# Altium PCB STM_BLUEPILL.PcbDoc
Units mm, origin at the board's own origin, x right, y up, seen from the top; angles counter-clockwise.
Board outline 54 x 23 mm, 2 copper layers (Top Layer, Bottom Layer); 30 components, 49 nets, 163 pads, 175 vias.
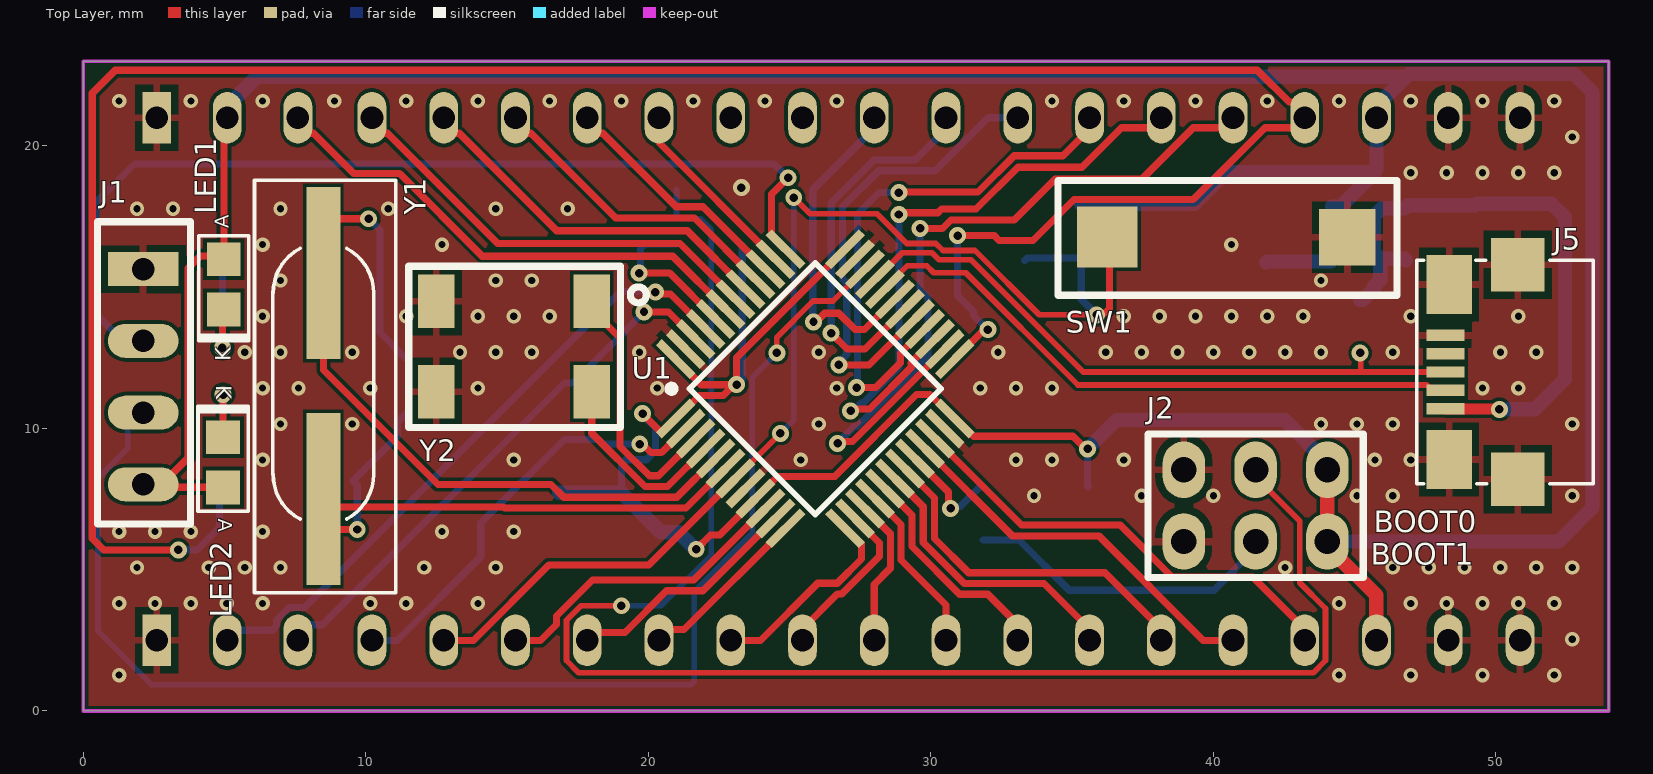
[diagram p0: Top Layer view]
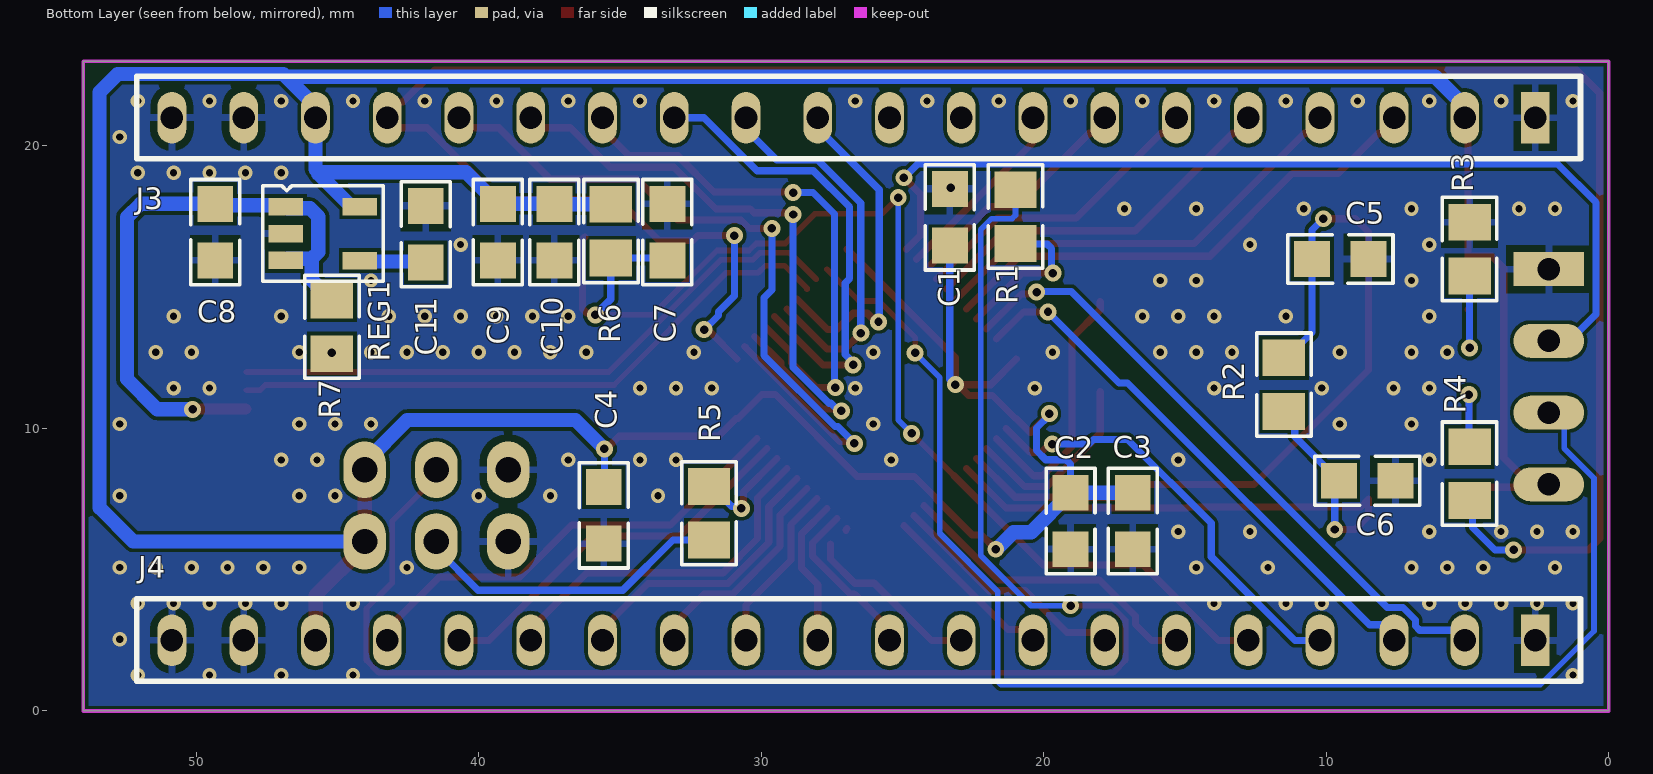
[diagram p1: Bottom Layer view, seen from below]
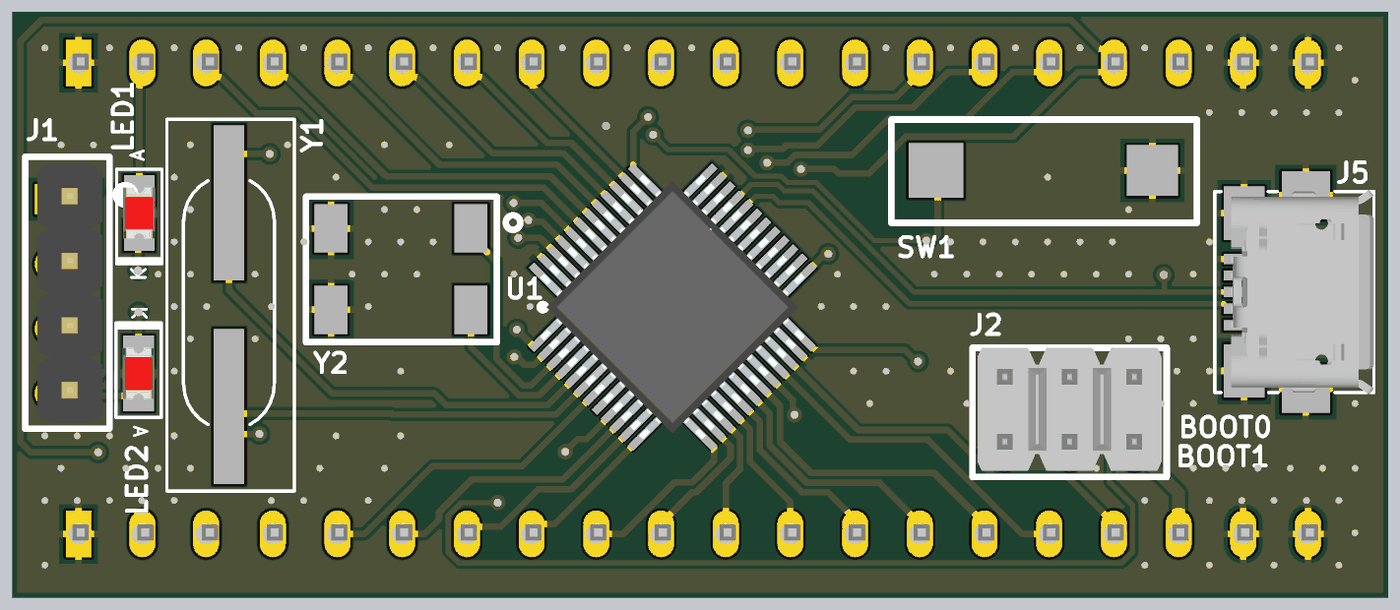
[diagram p2: 3D render of the assembled board from above, using the file's embedded part models]
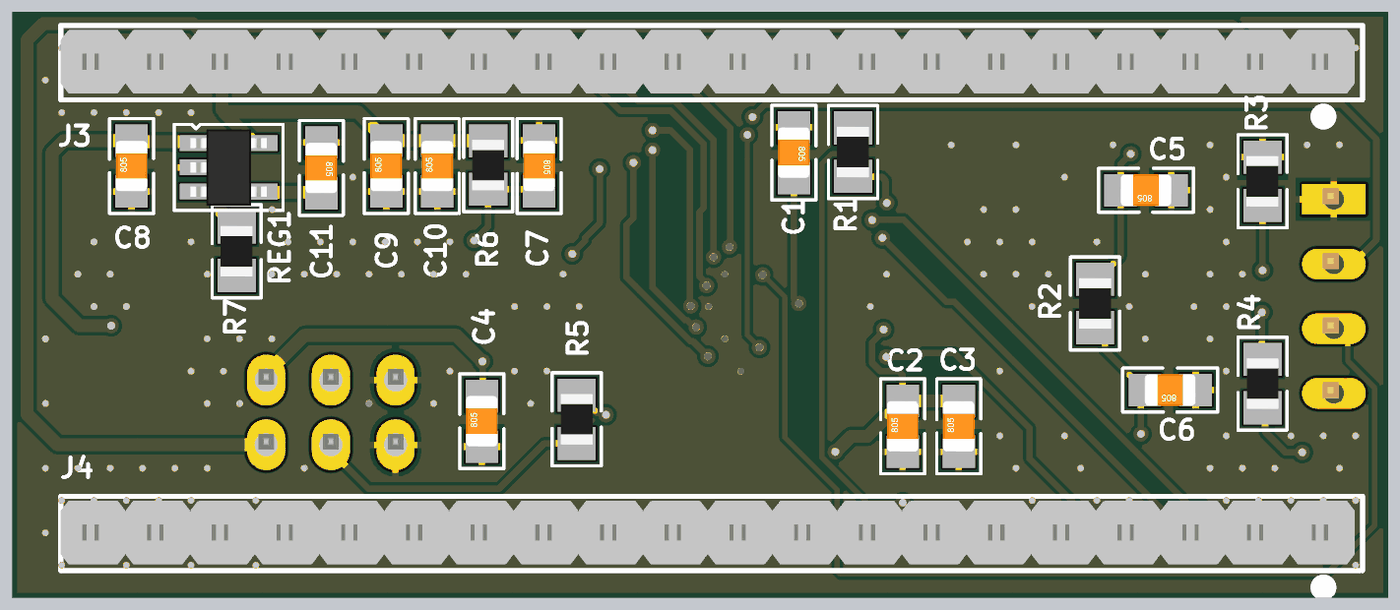
[diagram p3: 3D render of the assembled board from below, using the file's embedded part models]

## Layer stack, top to bottom
Top Solder: solder mask 0.0102, Solder Resist, Dk 3.5
Top Layer: signal copper 0.0356
Dielectric 1: dielectric 0.32, FR-4, Dk 4.8
Bottom Layer: signal copper 0.0356
Bottom Solder: solder mask 0.0102, Solder Resist, Dk 3.5

## Board outline
0,0 54,0 54,23 0,23

## Design rules (kind name [scope] priority, off if disabled: settings)
Clearance [All] p1: gap=0.127 ignorepadtopadclearanceinfootprint=TRUE
DiffPairsRouting DiffPair_90DiffPairsRouting [InDifferentialPairClass('diff_90')] p1: maxlimit=0.254 minlimit=0.254 mostfreqgap=0.254 toplayer_minwidth=0.203 toplayer_maxwidth=0.203 toplayer_prefwidth=0.203 bottomlayer_minwidth=0.203 bottomlayer_maxwidth=0.203 bottomlayer_prefwidth=0.203 maxuncoupledlength=12.7
DiffPairsRouting [All] p2: maxlimit=0.254 minlimit=0.254 mostfreqgap=0.254 toplayer_minwidth=0.381 toplayer_maxwidth=0.381 toplayer_prefwidth=0.381 bottomlayer_minwidth=0.381 bottomlayer_maxwidth=0.381 bottomlayer_prefwidth=0.381 maxuncoupledlength=12.7
MatchedLengths DiffPair_90MatchedLengths [InDifferentialPairClass('diff_90')] p1: tolerance=25.4 checknetsindiffpair=FALSE checkdiffpairvsdiffpair=TRUE checkxsignals=TRUE checkothers=TRUE
PolygonConnect [All] p1: connectstyle=Relief reliefconductorwidth=0.254 reliefentries=4 polygonreliefangle="90 Angle" airgapwidth=0.254
RoutingVias [All] p1: holewidth=0.711 width=1.27 viastyle="Through Hole" minholewidth=0.711 minwidth=1.27 maxholewidth=0.711 maxwidth=1.27
SolderMaskExpansion [All] p1: expansion=0.102 istentingtop=FALSE
Width [All] p1: maxlimit=1.27 minlimit=0.203 preferedwidth=0.254
29 further rules are at their usual default settings.

## Classes and differential pairs
differential pair class diff_90: D
component class [2]-Connector_Page: C8 C9 C10 C11 J3 J4 J5 R7 REG1
component class [1]-Controller_Page: C1 C2 C3 C4 C5 C6 C7 J1 J2 LED1 LED2 R1 R2 R3 R4 R5 R6 SW1 U1 Y1 Y2
differential pair D: +D_P -D_N

## Components (designator, comment, footprint, x,y, rotation, side; value= is the part's Value field where it differs from the comment)
C1 "0.1uF" CAP_0805 23.325,17.475 r270 bottom
C2 "0.1uF" CAP_0805 19.05,6.725 r90 bottom
C3 "0.1uF" CAP_0805 16.85,6.725 r90 bottom
C4 "0.1uF" CAP_0805 35.575,6.925 r90 bottom
C5 "22pF" CAP_0805 9.5,16 r0 bottom
C6 "22pF" CAP_0805 8.55,8.15 r0 bottom
C7 "0.1uF" CAP_0805 33.325,16.95 r270 bottom
C8 "0.1uF" CAP_0805 49.325,16.95 r90 bottom
C9 "0.1uF" CAP_0805 39.325,16.95 r90 bottom
C10 "1uF" CAP_0805 37.325,16.95 r90 bottom
C11 "22pF" CAP_0805 41.875,16.875 r270 bottom
J1 "4X1 Bergstrip" CON4_100_40D72_TH_ST_MALE 2.125,15.64 r0 top
J2 "2X3 Berg Strip" CON6_100_59D78_TH_ST_Duplicate 44.04,8.54 r180 top
J3 "20X1 Bergstrip" CON20_100_40D72_TH_ST 2.6,21 r270 bottom locked
J4 "20X1 Bergstrip" CON20_100_40D72_TH_ST 2.6,2.5 r270 bottom locked
J5 "MICRO USB2.0" CON_10118192-0001LF_SMD 49.5,12 r90 top
LED1 "RED LED" LED_0805 4.975,15.1 r90 top
LED2 "RED LED" LED_0805 4.95,8.8 r270 top
R1 "10K" RES_0805 21,17.5 r270 bottom
R2 "10Mohm" RES_0805 11.5,11.55 r90 bottom
R3 "1K" RES_0805 4.925,16.35 r270 bottom
R4 "1K" RES_0805 4.925,8.4 r90 bottom
R5 "10K" RES_0805 31.85,7 r90 bottom
R6 "10K" RES_0805 35.325,16.985 r270 bottom
R7 "10K" RES_0805 45.2,13.6 r270 bottom
REG1 "RT9193-33GB" SOT23-5 45.515,16.897 r270 bottom
SW1 "TACT SWITCH" SW_342_SMD 44.75,16.775 r0 top
U1 "STM32F103C8T6" LQFP-48_19.6_393_58X11_SMD 25.912,11.406 r45 top
Y1 "8MHz" XTAL_314_240X47_SMD 8.5,15.5 r270 top
Y2 "32.768KHz" "XTAL_MC-405 32.7680K-G3" 18,11.3 r180 top

## Footprints (in the part's own frame and the unit in brackets; to place one, negate y for a bottom-side part, rotate by r counter-clockwise, add the part's x,y. Pads: shape width x height; smd on the part's side, far side on the other; paste and mask are expansions set on the pad)
CAP_0805 [mm] "Ceramic Capacitor"
  rect 1.27x1.27 smd mask+0.076: 1(-1,0) 2(1,0)
  silkscreen extent -1.86,-0.86 1.86,0.86, body extent -1,-0.62 1,0.63, height 0.78
CON4_100_40D72_TH_ST_MALE [mm] "Berg Strip"
  rect 2.5x1.2 hole 0.8: 1(0,0)
  oval 2.5x1.2 hole 0.8: 2(0,-2.54) 3(0,-5.08) 4(0,-7.62)
  round 1.016 on Top Overlay: ""(2.311,0.178)
  silkscreen extent -1.63,-9.02 1.68,1.68, body extent -1.14,-8.76 1.4,1.4, height 8.55
CON6_100_59D78_TH_ST_Duplicate [mm] "Berg strip"
  oval 1.5x2 hole 0.9: 1(0,0) 2(0,2.54) 3(2.54,0) 4(2.54,2.54) 5(5.08,0) 6(5.08,2.54)
  silkscreen extent -1.27,-1.27 6.35,3.81, body extent -1.07,-1.27 6.15,3.56, height 8.18
CON20_100_40D72_TH_ST [mil] "Berg strip"
  rect 72x40 hole 31.5: 1(0,0)
  oval 72x40 hole 31.5: 2(0,-98.42) 3(0,-196.85) 4(0,-300) 5(0,-400) 6(0,-500) 7(0,-600) 8(0,-700) 9(0,-800) 10(0,-900) 11(0,-1000) 12(0,-1100) 13(0,-1200) 14(0,-1300) 15(0,-1400) 16(0,-1500) 17(0,-1600) 18(0,-1700) 19(0,-1800) 20(0,-1900)
  round 40 on Bottom Overlay: ""(83,2.57)
  silkscreen extent -58,-1949 57,63, body extent -51,-1949 47,51, height 323
CON_10118192-0001LF_SMD [mm] "USB2.0 MICRO"
  rect 0.4x1.35 smd: 1(-1.3,1.275) 2(-0.65,1.275) 3(0,1.275) 4(0.65,1.275) 5(1.3,1.275)
  rect 2.1x1.6 smd: 6(-3.1,1.15) 7(3.1,1.15)
  rect 1.9x1.9 smd: 8(-3.8,-1.275) 9(3.8,-1.275)
  silkscreen extent -3.95,-3.94 3.95,2.3, body extent -4.04,-3.94 4.04,1.66, height 2.81
LED_0805 [mm] "LED"
  rect 1.2x1.2 smd mask+0.076: A(0.889,0) K(-0.889,0)
  silkscreen extent -1.99,-0.89 1.73,0.89, body extent -1.01,-0.62 1.01,0.63, height 1.1
LQFP-48_19.6_393_58X11_SMD [mm] "48LQFP"
  rect 1.7x0.3 smd mask+0.076: 1(-4.238,2.75) 2(-4.238,2.25) 3(-4.238,1.75) 4(-4.238,1.25) 5(-4.238,0.75) 6(-4.238,0.25) 7(-4.238,-0.25) 8(-4.238,-0.75) 9(-4.238,-1.25) 10(-4.238,-1.75) 11(-4.238,-2.25) 12(-4.238,-2.75) 25(4.238,-2.75) 26(4.238,-2.25) 27(4.238,-1.75) 28(4.238,-1.25) 29(4.238,-0.75) 30(4.238,-0.25) 31(4.238,0.25) 32(4.238,0.75) 33(4.238,1.25) 34(4.238,1.75) 35(4.238,2.25) 36(4.238,2.75)
  rect 0.3x1.7 smd mask+0.076: 13(-2.75,-4.238) 14(-2.25,-4.238) 15(-1.75,-4.238) 16(-1.25,-4.238) 17(-0.75,-4.238) 18(-0.25,-4.238) 19(0.25,-4.238) 20(0.75,-4.238) 21(1.25,-4.238) 22(1.75,-4.238) 23(2.25,-4.238) 24(2.75,-4.238) 37(2.75,4.238) 38(2.25,4.238) 39(1.75,4.238) 40(1.25,4.238) 41(0.75,4.238) 42(0.25,4.238) 43(-0.25,4.238) 44(-0.75,4.238) 45(-1.25,4.238) 46(-1.75,4.238) 47(-2.25,4.238) 48(-2.75,4.238)
  silkscreen extent -3.72,-3.15 3.15,3.72, body extent -4.5,-4.5 4.5,4.5, height 1.7
RES_0805 [mm] "Resister"
  rect 1.3x1.5 smd mask+0.076: 1(0.95,0) 2(-0.95,0)
  silkscreen extent -1.83,-0.97 1.83,0.97, body extent -1,-0.63 1,0.62, height 0.5
SOT23-5 [mm] "CASE: SOT"
  rect 0.62x1.22 smd mask+0.076: 1(-0.953,-1.31) 2(-0.003,-1.31) 3(0.947,-1.31) 4(0.952,1.31) 5(-0.953,1.31)
  silkscreen extent -1.69,-2.14 1.69,2.14, body extent -1.5,-1.5 1.5,1.5, height 1.41
SW_342_SMD [mm] "CASE: SMD"
  rect 2x2 smd: 1(0,0)
  rect 2.15x2.15 smd: 2(-8.5,0)
  silkscreen extent -10.25,-2.06 1.75,2, body extent -7.17,-1.79 -1.17,1.71, height 2.4
XTAL_314_240X47_SMD [mm] "CASE: TH"
  rect 6.096x1.2 smd: 1(0,0) 2(8,0)
  silkscreen extent -3.29,-2.44 11.32,2.57, body extent -2.99,-2.27 10.9,2.41, height 3.05
"XTAL_MC-405 32.7680K-G3" [mm] "Crystal"
  rect 1.3x1.9 smd: 1(0,-3.2) 2(5.5,-3.2) 3(5.5,0) 4(0,0)
  silkscreen extent -1.93,-4.44 6.48,1.27, body extent -1.02,-4.44 6.48,1.27, height 3.6

## Part data
C1 C2 C3 C4 C7 C8 C9: library part CAP_0.1uF-50V-5%-0805, "0.1µF ±5% 50V Ceramic Capacitor X7R 0805 (2012 Metric)", Case/Package="0805 (2012 Metric)", Manufacturer=KEMET, Manufacturing Part Number=C0805C104J5RACTU, Supplier Part Number-1=399-1171-1-ND, Supplier-1=Digikey
C5 C6 C11: library part CAP_22pF-50V-5%-0805, "22pF ±5% 50V Ceramic Capacitor C0G, NP0 0805 (2012 Metric)", Case/Package=0805, Manufacturer=KEMET, Manufacturer Part Number=C0805C220J5GACTU, Supplier Part Number-1=399-1113-1-ND, Supplier-1=Digikey
C10: library part CAP_1uF-50V-5%-0805, "1µF ±5% 50V Ceramic Capacitor X7R 0805 (2012 Metric)", Case/Package="0805 (2012 Metric)", Manufacturer=Yageo, Manufacturing Part Number=CC0805JKX7R9BB105, Supplier Part Number-1=311-3498-1-ND, Supplier-1=Digikey
J1: library part CON-BS-PLG_4X1-100-TH-ST, "4 pin, 1 row, 2.54mm pitch bergstrip", Case/Package=TH, Manufacturer=NA, Manufacturing Part Number=NA, Supplier Part Number-1=NA, Supplier-1=NA
J2: library part CON-BS-PLG_2X3-100-TH-ST, "6 pin, 2 row, 2.54mm pitch bergstrip", Case/Package=TH, Manufacturer=NA, Manufacturer Part Number=NA, Supplier Part Number-1=NA, Supplier-1=NA
J3 J4: library part CON-BS-PLG_20X1-100-TH-ST, "20 pin, 1 row, 2.54mm pitch bergstrip", Case/Package=TH, Manufacturer=NA, Manufacturing Part Number=NA, Supplier Part Number-1=NA, Supplier-1=NA
J5: library part CON-USB_10118192-0002LF-SMD, "USB - micro B USB 2.0 Receptacle Connector 5 Position Surface Mount, Right Angle", Case/Package=SMD, Manufacturer="Amphenol ICC (FCI)", Manufacturing Part Number=10118192-0002LF, Supplier Part Number-1=609-5379-1-ND, Supplier-1=Digikey
LED1 LED2: library part LED-RED_10mA-0805, "Red 621nm LED Indication - Discrete 2V 0805 (2012 Metric)", Case/ Package=0805, Manufacturer="Lite-On Inc.", Manufacturer Part Number=LTST-C170EKT, Supplier Part Number-1=160-1178-1-ND, Supplier-1=Digikey
R1 R5 R6 R7: library part RES_10K-0.125W-1%-0805, "10 kOhms ±1% 0.125W, 1/8W Chip Resistor 0805 (2012 Metric) Moisture Resistant Thick Film", Case/Package=0805, Manufacturer=Yageo, Manufacturing Part Number=RC0805FR-0710KL, Supplier Part Number-1=311-10.0KCRCT-ND, Supplier-1=Digikey
R2: library part RES_10MOHM-0.125W-1%-0805, "10 MOhms ±1% 0.125W, 1/8W Chip Resistor 0805 (2012 Metric) Automotive AEC-Q200, High Voltage Thick Film", Case/Package="0805 (2012 Metric)", Manufacturer="Rohm Semiconductor", Manufacturing Part Number=KTR10EZPF1005, Supplier Part Number-1=RHM10.0MAHCT-ND, Supplier-1=Digikey
R3 R4: library part RES_1K-0.125W-1%-0805, "1 kOhms ±1% 0.125W, 1/8W Chip Resistor 0805 (2012 Metric) Moisture Resistant Thick Film", Case/Package=0805, Manufacturer=垈㎵á, Manufacturer Part Number=RC0805FR-071KL, Supplier Part Number-1=311-1.00KCRCT-ND, Supplier-1=Digikey
REG1: library part REG_3.3V-5.5V-0.3A-SOT-23-5, "Linear Voltage Regulator IC 1 Output 300mA SOT-23-5", Case/ Package=SOT-23-5, Manufacturer="Richtek USA Inc.", Supplier Part Number-1=1028-1014-1-ND, Manufacturer Part Number=RT9193-33GB, Supplier-1=Digikey
SW1: library part SW_KSR223GLFG-SMD, "Tactile Switch SPST-NO Top Actuated Surface Mount", Case/Package=SMD, Manufacturer=C&K, Manufacturing Part Number=KSR223GLFG, Supplier Part Number-1=401-1704-1-ND, Supplier-1=Digikey
U1: library part "IC-STM32F103C8T6 _1", "ARM® Cortex®-M3 STM32F1 Microcontroller IC 32-Bit 72MHz 64KB (64K x 8) FLASH", Case/Package=48-LQFP, Manufacturer=STMicroelectronics, Supplier Part Number-1=497-6063-ND, Manufacturer Part Number=STM32F103C8T6, Supplier-1=Digikey
Y1: library part XTAL_8MHZ-LFXTAL030234, "Crystals 8MHz 22pF -20C 70C", Case/Package=SMD, Manufacturer="IQD Frequency Products", Manufacturing Part Number=LFXTAL030234Reel, Supplier Part Number-1=449-LFXTAL030234REEL, Supplier-1=Mouser
Y2: library part "XTAL_32.768KHz-MC-405 32.7680K-G3", "Crystals SMD AT XTL MHZ +/-50PPM 12.5 PF 250 T/R", Case/Package=SMD, Manufacturer=Epson, Manufacturing Part Number="MC-405 32.7680K-G3: ROHS", Supplier Part Number-1=732-MC405327680KG3RS, Supplier-1=Mouser

## Via types
v1: diameter 0.508, hole 0.254, Top Layer to Bottom Layer, tented both sides, 141 vias
v2: diameter 0.6, hole 0.3, Top Layer to Bottom Layer, tented both sides, 34 vias

## Nets (pads, with @x,y where several pads share a name; then routed paths per layer and width w, separated by ;. In a path a pad name is that pad's centre, name@x,y a point inside that pad or via, vN(x,y) a via of type N, cw(c..) or ccw(c..) an arc to the next point about the centre after c; other vN are vias at no path point)
+3V3: C1.2 C2.2 C3.2 C4.2 C9.2 C10.2 J1.4 J2.1 J2.2 J3.2 J3.18 J4.18 LED1.A LED2.A R6.2 REG1.5 U1.1 U1.9 U1.24 U1.36 U1.48 | length 171
  Top Layer w0.254: J1.4@2,7.92 J1.4@2.675,7.92 ; LED2.A 4.941,7.92 J1.4@2.675,7.92 ; J3.2 4.978,20.878 4.978,15.992 LED1.A 4.861,16.103 4.143,16.103 3.72,15.68 3.72,8.965 J1.4@2.675,7.92 ; v2(19.8,10.525) 20.455,9.87 20.488,9.87 U1.1 21.004,10.354 21.819,11.169 22.654,11.169 v2@23.035,11.55 ; U1.48 21.879,11.55 v2@23.035,11.55 ; v2(21.7,5.725) 22.2,6.225 22.532,6.225 23.799,7.493 U1.9 24.574,8.3 26.6,8.3 29.5,11.2 29.975,11.2 30.821,10.354 U1.24 30.886,10.354 31.515,9.725 35.037,9.725 35.487,9.275 v2(35.55,9.275) ; U1.36 23.129,12.512 v2(23.129,11.55) v2@23.035,11.55
  Top Layer w0.508: J2.1 J2.2 44.04,5.835 45.775,4.1 45.775,2.505 J4.18
  Bottom Layer w0.254: C2.2 19.05,8.741 19.205,8.896 19.929,8.896 20.254,9.221 20.254,10.016 19.8,10.47 v2(19.8,10.525) ; v2(23.129,11.55) 23.325,11.746 C1.2 ; v2(35.55,9.275) 35.55,7.95 C4.2
  Bottom Layer w0.508: J3.2 5.1,21.406 6.144,22.45 46.824,22.45 ; C3.2 C2.2 20.445,6.331 21.069,6.331 21.675,5.725 v2(21.7,5.725) ; R6.2 35.333,17.942 37.317,17.942 C10.2 C9.2 40.45,19.075 45.675,19.075 ; v2(35.55,9.275) 36.575,10.3 42.53,10.3 44.04,8.79 J2.1 ; J2.2 52.225,6 53.425,7.2 53.425,21.9 52.775,22.55 46.924,22.55 46.824,22.45 ; REG1.5 44.505,17.85 45.675,19.02 45.675,19.075 ; 45.675,19.075 45.78,19.18 J3.18 45.78,21.406 46.824,22.45
+5V: C8.2 J5.1 R7.2 REG1.1 REG1.3 | length 21.9
  Top Layer w0.381: J5.1@48.237,10.688 v2@50.112,10.688
  Top Layer w0.508: v2@50.112,10.688 v2(50.125,10.675)
  Bottom Layer w0.508: R7.2 45.3,14.55 45.696,14.946 45.696,15.046 45.917,15.267 45.917,16.006 ; REG1.3 46.769,16.006 45.917,16.006 ; v2(50.125,10.675) 51.375,10.675 52.45,11.75 52.45,17.475 51.975,17.95 C8.2 49.275,17.9 46.875,17.9 REG1.1 46.769,17.794 45.973,17.794 45.675,17.496 45.675,16.248 45.917,16.006
BOOT0: J2.3 R1.2 | length 56.4
  Top Layer w0.203: v2(19.05,3.725) 17.617,3.725 17.103,3.212 17.103,1.788 17.535,1.357 43.545,1.357 43.977,1.788 43.977,3.625 43.061,4.541 43.061,6.729 41.5,8.29 J2.3
  Bottom Layer w0.203: v2(19.05,3.725) 20.448,3.725 22.229,5.506 22.229,17.045 21.845,17.429 21.119,17.429 21,17.548 R1.2
BOOT1: J2.4 R5.2 | length 11.2
  Bottom Layer w0.254: R5.2 33.125,6.05 34.9,4.275 40.025,4.275 41.5,5.75 J2.4
D_N: J5.2 U1.32 | length 22
  Top Layer w0.203: U1.32 28.379,14.963 29.18,15.764 29.854,15.764 30.104,15.514 31.236,15.514 35.207,11.543 47.557,11.543 47.75,11.35 J5.2
D_P: J5.3 R7.1 U1.33 | length 23
  Top Layer w0.203: U1.33@28.055,15.286 28.991,16.222 30.044,16.222 30.294,15.971 31.425,15.971 35.397,12 45.225,12 ; v2(45.2,12.675) 45.225,12.65 45.225,12 ; J5.3 45.225,12
GND: C1.1 C2.1 C3.1 C4.1 C5.1 C6.1 C7.1 C8.1 C9.1 C10.1 C11.1 J1.1 J2.5 J2.6 J3.1 J3.19 J3.20 J4.1 J4.19 J4.20 J5.5 J5.6 J5.7 J5.8 J5.9 R3.2 REG1.2 SW1.1 U1.8 U1.23 U1.35 U1.47 Y2.2 Y2.3
  other v1: 1.27,1.27 44.45,1.27 46.99,1.27 49.53,1.27 52.07,1.27 52.705,2.54 1.27,3.81 2.54,3.81 3.81,3.81 5.08,3.81 6.35,3.81 10.16,3.81 11.43,3.81 13.97,3.81 44.45,3.81 46.99,3.81 48.26,3.81 49.53,3.81 50.8,3.81 52.07,3.81 1.905,5.08 4.445,5.08 5.715,5.08 6.985,5.08 12.065,5.08 14.605,5.08 42.545,5.08 46.355,5.08 47.625,5.08 48.895,5.08 50.165,5.08 51.435,5.08 52.705,5.08 1.27,6.35 2.54,6.35 3.81,6.35 6.35,6.35 12.7,6.35 15.24,6.35 33.655,7.62 37.465,7.62 40.005,7.62 45.085,7.62 46.355,7.62 52.705,7.62 6.35,8.89 15.24,8.89 25.4,8.89 33.02,8.89 34.29,8.89 36.83,8.89 45.72,8.89 46.99,8.89 6.985,10.16 9.525,10.16 26.035,10.16 43.815,10.16 45.085,10.16 46.355,10.16 52.705,10.16 6.35,11.43 7.62,11.43 10.16,11.43 13.97,11.43 20.32,11.43 26.67,11.43 31.75,11.43 33.02,11.43 34.29,11.43 49.53,11.43 50.8,11.43 5.715,12.7 6.985,12.7 9.525,12.7 13.335,12.7 14.605,12.7 15.875,12.7 19.685,12.7 26.035,12.7 32.385,12.7 36.195,12.7 37.465,12.7 38.735,12.7 40.005,12.7 41.275,12.7 42.545,12.7 43.815,12.7 46.355,12.7 50.165,12.7 51.435,12.7 6.35,13.97 11.43,13.97 13.97,13.97 15.24,13.97 16.51,13.97 36.83,13.97 38.1,13.97 39.37,13.97 40.64,13.97 41.91,13.97 43.18,13.97 46.99,13.97 50.8,13.97 6.985,15.24 14.605,15.24 15.875,15.24 43.815,15.24 6.35,16.51 12.7,16.51 40.64,16.51 1.905,17.78 3.175,17.78 6.985,17.78 10.795,17.78 14.605,17.78 17.145,17.78 46.99,19.05 48.26,19.05 49.53,19.05 50.8,19.05 52.07,19.05 52.705,20.32 1.27,21.59 3.81,21.59 6.35,21.59 8.89,21.59 11.43,21.59 13.97,21.59 16.51,21.59 19.05,21.59 21.59,21.59 24.13,21.59 26.67,21.59 34.29,21.59 36.83,21.59 39.37,21.59 41.91,21.59 44.45,21.59 46.99,21.59 49.53,21.59 52.07,21.59
  other v2: 23.3,18.525
NetC11_2: C11.2 REG1.4 | length 2.4
  Bottom Layer w0.508: C11.2 41.91,15.91 44.17,15.91 REG1.4
NetLED1_K: LED1.K R3.1 | length 3.9
  Top Layer w0.254: v2(4.925,12.85) 4.925,14.161 LED1.K
  Bottom Layer w0.254: v2(4.925,12.85) R3.1
NetLED2_K: LED2.K R4.1 | length 3.4
  Top Layer w0.254: LED2.K v2(4.95,11.2)
  Bottom Layer w0.254: R4.1 4.95,9.375 v2(4.95,11.2)
NetR1_1: R1.1 U1.44 | length 5.6
  Top Layer w0.254: v2(19.675,15.5) 20.757,15.5 U1.44
  Bottom Layer w0.254: v2(19.675,15.5) 19.725,15.55 19.725,16.376 19.874,16.525 20.975,16.525 R1.1
NetR5_1: R5.1 U1.20 | length 3.8
  Top Layer w0.254: U1.20 30.634,7.745 30.634,7.241 v2(30.7,7.175)
  Bottom Layer w0.254: v2(30.7,7.175) 30.766,7.241 31.041,7.241 31.75,7.95 R5.1
NRST: C7.2 J4.5 R6.1 SW1.2 U1.7 | length 43.5
  Top Layer w0.203: U1.7 23.092,8.237 24.675,9.82 v2(24.675,9.825) ; v2(25.15,18.175) 25.725,17.6 28.102,17.6 29.151,16.552 30.18,16.552 30.431,16.302 31.562,16.302 33.839,14.025 v2(35.875,14.025)
  Top Layer w0.254: J4.5 13.816,2.5 16.482,5.166 20.019,5.166 U1.7@23.18,8.327 ; v2(35.875,14.025) 35.941,14.091 36.176,14.091 36.325,14.24 36.325,16.7 SW1.2
  Bottom Layer w0.203: v2(24.675,9.825) 25.15,10.3 v2(25.15,18.175)
  Bottom Layer w0.254: C7.2 33.41,16.035 R6.1 35.325,14.575 v2(35.875,14.025)
PA0: J4.6 U1.10 | length 11.1
  Top Layer w0.254: J4.6 16.189,2.5 16.748,3.059 16.748,3.359 18.024,4.635 21.61,4.635 U1.10@24.241,7.266
PA1: J4.7 U1.11 | length 8.6
  Top Layer w0.254: J4.7 18.119,2.779 19.175,2.779 20.65,4.254 21.936,4.254 U1.11@24.594,6.912
PA2: J4.8 U1.12 | length 6.3
  Top Layer w0.254: J4.8 20.38,2.528 20.732,2.88 21.269,2.88 U1.12@24.948,6.559
PA3: J4.9 U1.13 | length 6.4
  Top Layer w0.254: J4.9 23.976,2.5 25.997,4.521 26.692,4.521 27.547,5.376 U1.13@27.547,5.9 ; U1.13 27,6.429 U1.13@27,6.4
PA4: J4.10 U1.14 | length 5.9
  Top Layer w0.254: J4.10 25.46,2.906 26.694,4.14 26.85,4.14 28.188,5.479 28.188,5.948 U1.14
PA5: J4.11 U1.15 | length 5.3
  Top Layer w0.254: U1.15 28.569,6.274 28.569,5.051 28,4.481 J4.11
PA6: J4.12 U1.16 | length 6.1
  Top Layer w0.254: U1.16 28.95,6.6 28.95,5.345 30.54,3.755 J4.12
PA7: J4.13 U1.17 | length 7.9
  Top Layer w0.254: U1.17 29.331,6.926 29.331,5.819 31.018,4.132 32.018,4.132 33.08,3.07 J4.13
PA8: J3.13 U1.29 | length 16.8
  Top Layer w0.254: v2(26.75,12.25) 27.811,12.25 U1.29@29.527,13.966
  Bottom Layer w0.254: v2(26.75,12.25) 26.75,12.344 27.029,12.623 27.029,15.15 26.871,15.309 26.871,17.836 28.159,19.125 30.149,19.125 32.024,21 J3.13
PA9: J3.12 U1.30 | length 13.6
  Top Layer w0.254: v2(26.475,13.375) 27.034,12.816 27.676,12.816 U1.30
  Bottom Layer w0.254: v2(26.475,13.375) 26.475,17.98 28.001,19.506 29.452,19.506 30.54,20.594 J3.12
PA10: J3.11 U1.31 | length 11.8
  Top Layer w0.254: v2(25.85,13.775) 25.944,13.775 26.248,14.079 26.746,14.079 27.325,13.5 27.653,13.5 U1.31
  Bottom Layer w0.254: v2(25.85,13.775) 25.825,13.8 25.825,18.45 28,20.625 J3.11
PA11: J3.10
PA12: J3.9
PA15: J3.8 U1.38 | length 6.7
  Top Layer w0.254: J3.8 20.38,20.36 20.38,20.24 20.38,20.12 U1.38
PB0: J4.14 U1.18 | length 10.2
  Top Layer w0.254: U1.18 29.732,7.232 29.732,5.968 31.187,4.513 34.013,4.513 35.62,2.906 J4.14
PB1: J4.15 U1.19 | length 12.7
  Top Layer w0.254: U1.19 30.136,7.536 30.136,6.103 31.345,4.894 36.172,4.894 38.16,2.906 J4.15
PB3: J3.7 U1.39 | length 8.7
  Top Layer w0.254: J3.7 17.84,20.8 18.192,20.448 18.392,20.448 20.99,17.85 21.943,17.85 U1.39
PB4: J3.6 U1.40 | length 11
  Top Layer w0.254: J3.6 15.3,20.8 15.652,20.448 15.852,20.448 18.85,17.45 21.636,17.45 U1.40
PB5: J3.5 U1.41 | length 13.3
  Top Layer w0.254: J3.5 12.76,20.8 13.112,20.448 13.312,20.448 16.76,17 21.379,17 U1.41
PB6: J3.4 U1.42 | length 15.6
  Top Layer w0.254: J3.4 10.22,20.8 10.572,20.448 10.772,20.448 14.67,16.55 21.122,16.55 U1.42
PB7: J3.3 U1.43 | length 18.1
  Top Layer w0.254: J3.3 7.6,20.8 7.952,20.448 8.152,20.448 9.575,19.025 11.2,19.025 14.125,16.1 20.864,16.1 U1.43
PB8: J4.2 U1.45 | length 22.7
  Top Layer w0.254: v2(20.25,14.825) 20.316,14.759 20.791,14.759 U1.45
  Bottom Layer w0.254: J4.2 5.1,2.508 5.452,2.86 6.689,2.86 6.838,3.009 6.838,3.222 7.284,3.668 7.843,3.668 19.025,14.85 20.225,14.85 v2(20.25,14.825)
PB9: J4.3 U1.46 | length 19.4
  Top Layer w0.254: v2(19.85,14.125) 20.718,14.125 U1.46
  Bottom Layer w0.254: J4.3 7.6,2.7 7.952,3.052 8.473,3.052 17.035,11.614 17.339,11.614 v2(19.85,14.125)
PB10: J4.16 U1.21 | length 13.7
  Top Layer w0.254: U1.21 32.886,6.2 35.944,6.2 39.644,2.5 J4.16
PB11: J4.17 U1.22 | length 16.3
  Top Layer w0.254: U1.22 33.212,6.581 36.709,6.581 38.544,4.746 41.4,4.746 43.24,2.906 J4.17
PB12: J3.17 R4.2 U1.25 | length 85.4
  Top Layer w0.254: v2(3.367,5.7) 0.725,5.7 0.318,6.107 0.318,21.868 1.132,22.682 41.557,22.682 42.688,21.552 42.888,21.552 43.24,21.2 J3.17 43.24,20.996 42.888,20.644 41.828,20.644 39.288,18.104 35.07,18.104 33.623,16.657 32.42,16.657 32.247,16.83 v2(30.95,16.83) ; U1.25 31.826,13.43 31.959,13.43 v2(32.025,13.496)
  Bottom Layer w0.254: v2(3.367,5.7) 4.025,5.7 4.825,6.5 4.825,7.35 R4.2 ; v2(30.95,16.83) 30.95,14.7 31.518,14.132 31.518,14.003 v2(32.025,13.496)
PB13: J3.16 U1.26 | length 27.1
  Top Layer w0.254: v2(26.7,9.475) 26.766,9.541 27.23,9.541 U1.26 30.588,12.899 U1.26@30.588,12.906 ; v2(29.625,17.08) 30.417,17.08 30.721,17.384 32.959,17.384 34.4,18.825 37.469,18.825 39.288,20.644 40.348,20.644 40.7,20.996 J3.16
  Bottom Layer w0.254: v2(26.7,9.475) 27.294,10.069 27.391,10.069 29.9,12.578 29.9,14.63 29.625,14.905 v2(29.625,17.08)
PB14: J3.15 U1.27 | length 22.7
  Top Layer w0.254: v2(27.162,10.623) 27.228,10.689 27.828,10.689 29.307,12.168 29.307,12.332 U1.27@30.234,13.259 ; v2(28.875,17.575) 28.934,17.634 30.251,17.634 30.381,17.765 31.604,17.765 33.084,19.246 35.35,19.246 36.748,20.644 37.808,20.644 38.16,20.996 J3.15
  Bottom Layer w0.254: v2(27.162,10.623) 27.255,10.623 27.528,10.896 27.604,10.896 28.875,12.167 v2(28.875,17.575)
PB15: J3.14 U1.28 | length 19.6
  Top Layer w0.254: v2(27.375,11.45) 28.05,11.45 28.925,12.325 28.925,12.675 29.863,13.613 U1.28@29.881,13.613 ; v2(28.875,18.35) 28.9,18.375 31.675,18.375 32.956,19.656 34.682,19.656 35.62,20.594 J3.14
  Bottom Layer w0.254: v2(27.375,11.45) 27.41,11.485 27.41,17.592 28.168,18.35 v2(28.875,18.35)
PC13: J4.4 U1.2 | length 15.3
  Top Layer w0.254: v2(19.7,9.45) 19.794,9.45 20.094,9.15 20.475,9.15 U1.2
  Bottom Layer w0.254: J4.4 11.109,2.5 14.072,5.463 14.072,6.651 17.035,9.614 18.239,9.614 18.403,9.45 v2(19.7,9.45)
SWCLK: J1.2 U1.37 | length 34.3
  Top Layer w0.254: U1.37 24.365,16.842 24.365,18.29 v2(24.95,18.875)
  Bottom Layer w0.254: J1.2 1.4,13.1 0.455,14.045 0.455,18.005 1.814,19.364 24.461,19.364 v2(24.95,18.875)
SWDIO: J1.3 U1.34 | length 47.9
  Top Layer w0.203: v2(24.55,12.675) 24.55,13.223 25.837,14.509 26.541,14.509 U1.34
  Bottom Layer w0.203: J1.3 2.037,10.56 1.577,10.1 1.577,9.293 0.525,8.242 0.525,2.829 2.429,0.925 21.506,0.925 21.625,1.044 21.625,4.233 23.681,6.289 23.681,11.806 v2(24.55,12.675)
XTALA: C5.2 R2.1 U1.5 Y1.1 | length 28.6
  Top Layer w0.254: v2(10.1,17.425) 8.973,17.425 8.5,16.952 Y1.1 8.5,12.071 12.557,8.014 16.559,8.014 17.008,7.565 21.011,7.565 U1.5
  Bottom Layer w0.254: v2(10.1,17.425) 10.5,17.025 C5.2 10.5,13.4 11.4,12.5 R2.1
XTALB: C6.2 R2.2 U1.6 Y1.2 | length 22
  Top Layer w0.254: v2(9.7,6.425) 8.973,6.425 8.5,6.898 Y1.2 8.775,7.225 14.882,7.225 14.923,7.184 21.337,7.184 U1.6
  Bottom Layer w0.254: v2(9.7,6.425) 9.7,8 C6.2 10.877,9.477 11.118,9.718 11.118,10.218 R2.2
XTALC: U1.3 Y2.1 | length 9.2
  Top Layer w0.254: Y2.1 18,14.2 19,13.2 19,9.367 20.04,8.327 20.359,8.327 U1.3
XTALD: U1.4 Y2.4 | length 6.8
  Top Layer w0.254: Y2.4 18,9.828 19.882,7.946 20.685,7.946 U1.4
pads on no net: J1. J3. J4. J5.4

## Polygon pours and split planes (outlines as drawn)
GND on Top Layer "GND_L01_P001" (solid, remove dead copper, pour order 1): 0,0 0,23 54,23 54,0
GND on Top Layer "GND_L01_P003" (solid, remove dead copper, pour order 3): 0,23 54,23 54,0 0,0
GND on Bottom Layer "GND_L02_P004" (solid, remove dead copper, pour order 4): 0,23 0,0 54,0 54,23

## Keep-outs
Keep-Out Layer:
  the board outline again, w0.127

## Silkscreen, mask and mechanical layers (free items; w line width, h text height)
Top Overlay:
  text "BOOT0" at 45.677,6.327 h0.76
  text "BOOT1" at 45.577,5.177 h0.76

## Text inside footprints (layer, text, board x,y; h text height)
LED1: Top Overlay "K" at 5.225,12.375 h0.56 r90; Top Overlay "A" at 5.15,17.087 h0.51 r90
LED2: Top Overlay "K" at 4.7,11.525 h0.56 r270; Top Overlay "A" at 4.775,6.813 h0.51 r270